# EAGLE board Laptimer (EAGLE 6.3)
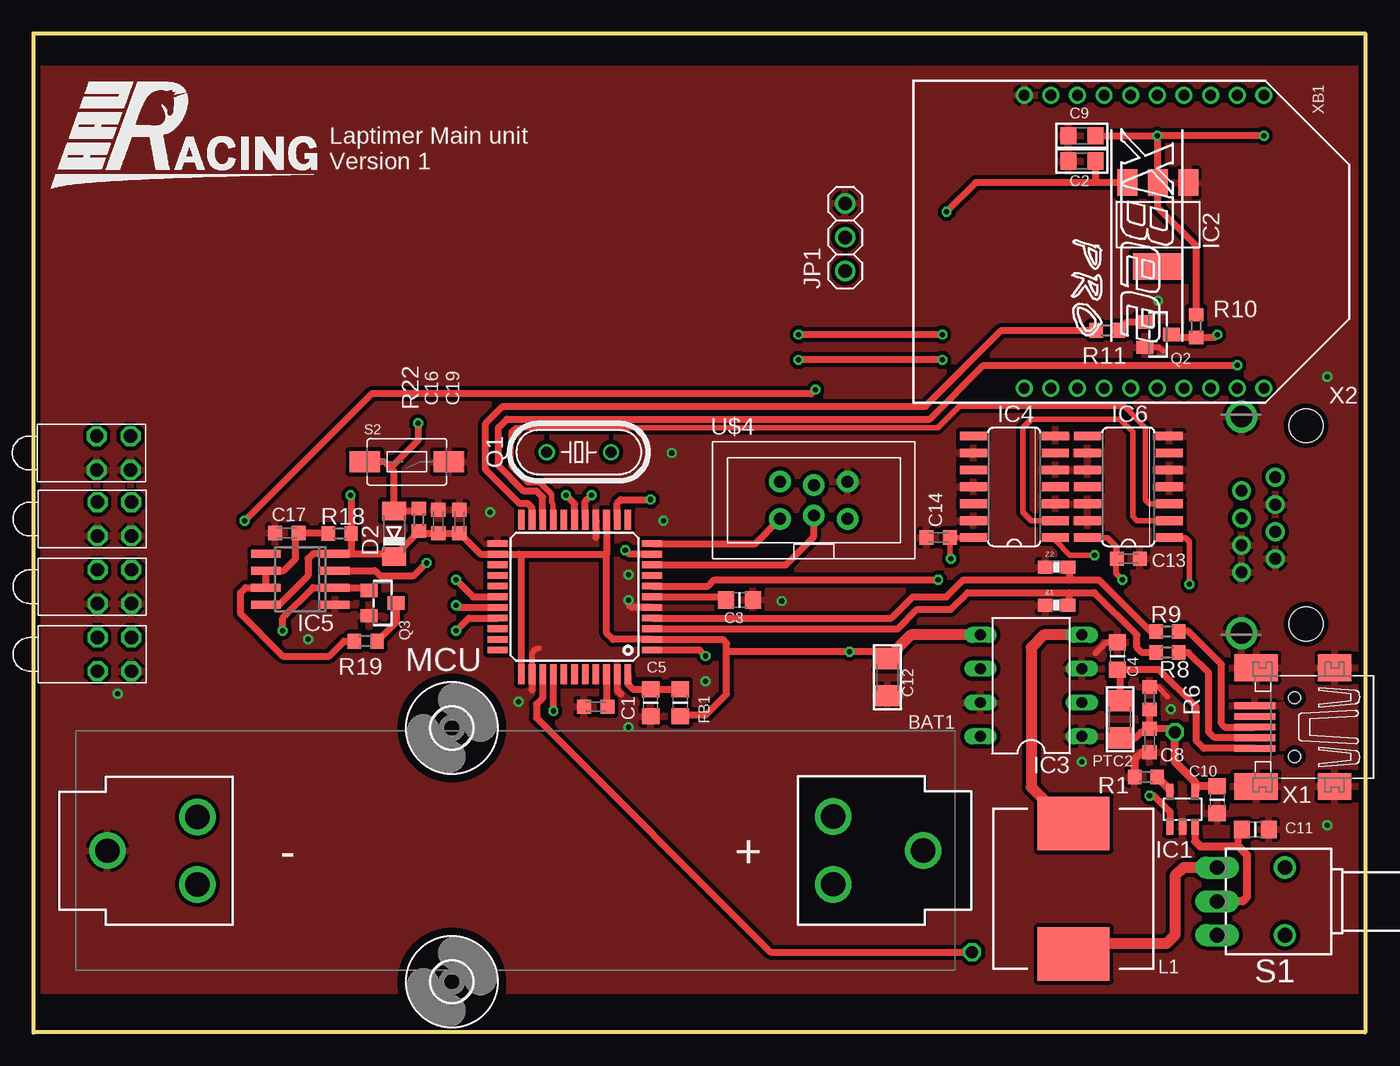
[diagram p0: board, top side]
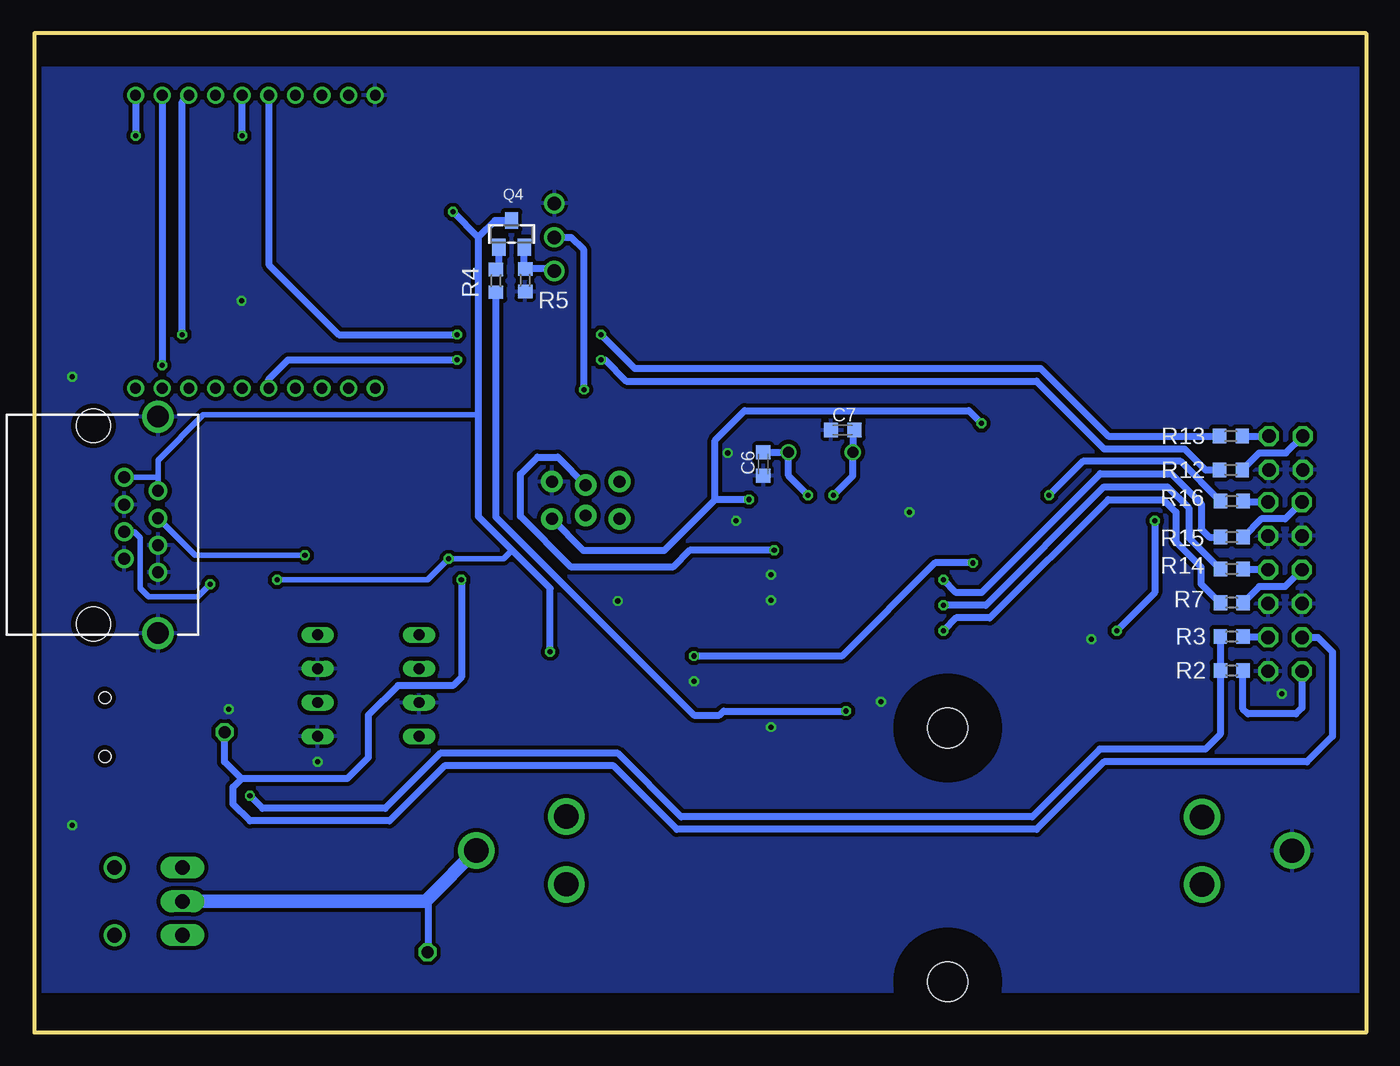
[diagram p1: board, bottom side, seen from below]

Size 100 x 75 mm. Coordinates in mm from the lower left corner, seen from the top.
Outline: 0,75 100,75 100,0 0,0 0,75
Copper layers (1*16): Top 0.0356mm / dielectric 1.5011mm / Bottom 0.0356mm
Design rules "LaenPCBOrder *": minimum track width 6mil, minimum drill 13mil, track to track 12mil, track to pad 12mil, pad to pad 12mil, via to via 12mil, smd to smd 12mil, copper to edge 15mil, drill to drill 6mil, minimum pad ring 7mil, minimum via ring 7mil, stop-mask expansion 3mil, vias tented up to drill 0mil, thermal gap 10mil

## Footprints (pad centres in the part's own frame; a part is rotated, then mirrored left to right if it is on the bottom)
BATTERY_18650-HOLDER = drill 1.829: GND@1 30.628,0.01; GND@2 23.88,2.55; GND@3 23.88,-2.53; PWR@1 -30.628,-0.01; PWR@2 -23.88,2.53; PWR@3 -23.88,-2.55
C0603K = smd 1.05 x 1.08: 1 -0.875,0; 2 0.875,0
_0805 = smd 1.2 x 1.3: 1 -1.016,0; 2 1.016,0
_0805MP = smd 1.2 x 1.3: 1 -1.016,0; 2 1.016,0
1206 = smd 1.6 x 1.8: 1 -1.4,0; 2 1.4,0
MINIMELF = smd 1.4 x 1.8: A 1.7,0; C -1.7,0
3,0 = hole 3: 0,0
SOT23-5L = smd 0.55 x 1.2: 1 -0.95,-1.3; 2 0,-1.3; 3 0.95,-1.3; 4 0.95,1.3; 5 -0.95,1.3
SOT223 = smd 1.499 x 2.007: 1 -2.261,-3.15; 2 0.025,-3.15; 3 2.311,-3.15 | smd 3.81 x 2.007: 4 0,3.15
DIL08 = drill 0.813 long: 1 -3.81,-3.81; 2 -1.27,-3.81; 3 1.27,-3.81; 4 3.81,-3.81; 5 3.81,3.81; 6 1.27,3.81; 7 -1.27,3.81; 8 -3.81,3.81
SO14 = smd 0.66 x 2.032: 1 -3.81,-3.073; 2 -2.54,-3.073; 3 -1.27,-3.073; 4 0,-3.073; 5 1.27,-3.073; 6 2.54,-3.073; 7 3.81,-3.073; 8 3.81,3.073; 9 2.54,3.073; 10 1.27,3.073; 11 0,3.073; 12 -1.27,3.073; 13 -2.54,3.073; 14 -3.81,3.073
SO08 = smd 0.6 x 2.2: 1 -1.905,-2.6; 2 -0.635,-2.6; 3 0.635,-2.6; 4 1.905,-2.6; 5 1.905,2.6; 6 0.635,2.6; 7 -0.635,2.6; 8 -1.905,2.6
1X03 = drill 1.016: 1 -2.54,0; 2 0,0; 3 2.54,0
CDRH125 = smd 5.4 x 4: 1 0,4.9; 2 0,-4.9
TQFP44 = smd 1.5 x 0.5: 1 -5.8,4; 2 -5.8,3.2; 3 -5.8,2.4; 4 -5.8,1.6; 5 -5.8,0.8; 6 -5.8,0; 7 -5.8,-0.8; 8 -5.8,-1.6; 9 -5.8,-2.4; 10 -5.8,-3.2; 11 -5.8,-4; 23 5.8,-4; 24 5.8,-3.2; 25 5.8,-2.4; 26 5.8,-1.6; 27 5.8,-0.8; 28 5.8,0; 29 5.8,0.8; 30 5.8,1.6; 31 5.8,2.4; 32 5.8,3.2; 33 5.8,4 | smd 0.5 x 1.5: 12 -4,-5.8; 13 -3.2,-5.8; 14 -2.4,-5.8; 15 -1.6,-5.8; 16 -0.8,-5.8; 17 0,-5.8; 18 0.8,-5.8; 19 1.6,-5.8; 20 2.4,-5.8; 21 3.2,-5.8; 22 4,-5.8; 34 4,5.8; 35 3.2,5.8; 36 2.4,5.8; 37 1.6,5.8; 38 0.8,5.8; 39 0,5.8; 40 -0.8,5.8; 41 -1.6,5.8; 42 -2.4,5.8; 43 -3.2,5.8; 44 -4,5.8
HC49/S = drill 0.813: 1 -2.413,0; 2 2.413,0
SOT23-WIDE = smd 1 x 1.27: 1 -0.95,-1; 2 0.95,-1; 3 0,1
R0603 = smd 1 x 1.1: 1 -0.85,0; 2 0.85,0
TL3XWO = drill 1.1 pad 1.422 long: 1 -2.54,-5.08; 2 0,-5.08; 3 2.54,-5.08 | drill 1.1 pad 1.676: M1 -2.54,0; M2 2.54,0
TACTILE-SWITCH-1101NE = smd 2.3 x 1.6: P$1 -3.15,0; P$2 3.15,0
BI-LEVEL-LED-INDICATOR = drill 1 octagon: ANODE1 1.27,1.27; ANODE2 1.27,-1.27; CATHODE1 -1.27,1.27; CATHODE2 -1.27,-1.27
AVRISP-BOX = drill 0.9 pad 1.626: 1 -1.397,2.54; 2 1.397,2.54; 3 -1.143,0; 4 1.143,0; 5 -1.397,-2.54; 6 1.397,-2.54
32005-301 = smd 3.1 x 0.5: 1 3,1.6; 2 3,0.8; 3 3,0; 4 3,-0.8; 5 3,-1.6 | smd 2.5 x 2: M1 -3,-4.45; M2 -3,4.45 | smd 3.3 x 2: M3 2.9,4.45; M4 2.9,-4.45 | hole 0.9: 0,2.2; 0,-2.2
GLX-S-88M = drill 0.9 pad 1.422: 1 -3.57,-2.3; 2 -2.55,-4.84; 3 -1.53,-2.3; 4 -0.51,-4.84; 5 0.51,-2.3; 6 1.53,-4.84; 7 2.55,-2.3; 8 3.57,-4.84 | drill 1.6 pad 2.184: S1 -8.125,-4.84; S2 8.125,-4.84 | hole 2.55: -7.44,0; 7.44,0
XBEE-PRO = drill 0.8 pad 1.27: 1 -11,9; 2 -11,7; 3 -11,5; 4 -11,3; 5 -11,1; 6 -11,-1; 7 -11,-3; 8 -11,-5; 9 -11,-7; 10 -11,-9; 11 11,-9; 12 11,-7; 13 11,-5; 14 11,-3; 15 11,-1; 16 11,1; 17 11,3; 18 11,5; 19 11,7; 20 11,9
0603-RES = smd 1.1 x 1: 1 -0.85,0; 2 0.85,0

## Placement (x,y rotation side)
BAT1  [BATTERY_18650-HOLDER]  36.2,13.65 180 top
C1  100n  [C0603K]  42.23,24.45 180 top
C2  10u  [_0805]  78.74,65.41 180 top
C3  1u  [_0805MP]  53.03,32.46 180 top
C4  22u  [_0805MP]  81.41,28.26 90 top
C5  1u  [_0805MP]  46.35,24.77 90 top
C6  22pf  [C0603K]  45.28,42.67 90 bottom
C7  22pf  [C0603K]  39.3,45.21 0 bottom
C8  100n  [C0603K]  83.82,21.91 270 top
C9  22u  [_0805]  78.74,67.31 180 top
C10  10u  [_0805MP]  88.9,17.46 90 top
C11  10u  [_0805MP]  91.76,15.24 0 top
C12  100u  [1206]  64.14,26.67 270 top
C13  100n  [C0603K]  82.23,35.56 180 top
C14  100n  [C0603K]  67.94,37.15 180 top
C16  100n  [C0603K]  30.42,38.35 90 top
C17  100n  [C0603K]  19.05,37.5 180 top
C19  100n  [C0603K]  32,38.35 90 top
D2  CD1206-S01575  [MINIMELF]  27.08,37.44 90 top
FB1  MH2029  [_0805MP]  48.58,24.77 90 top
H1  MOUNT-HOLE3.0  [3,0]  31.43,22.86 0 top
H2  MOUNT-HOLE3.0  [3,0]  31.43,3.81 0 top
IC1  MCP73831/OT  [SOT23-5L]  86.3,16.76 0 top
IC2  REG1117  [SOT223]  84.45,60.64 180 top
IC3  MAX631CPA  [DIL08]  74.93,26.04 90 top
IC4  74HC04D  [SO14]  73.66,40.96 90 top
IC5  NE555D  [SO08]  20.07,34.03 90 top
IC6  74HC08D  [SO14]  82.23,40.96 90 top
JP1  [1X03]  60.96,59.69 90 top
L1  DRA125-331-R  [CDRH125]  78.11,10.79 180 top
MCU  ATMEGA32U4-AU  [TQFP44]  40.65,32.7 180 top
PTC2  [1206]  81.6,23.5 90 top
Q1  8mhz  [HC49/S]  40.96,43.56 180 top
Q2  [SOT23-WIDE]  84.45,52.39 270 top
Q3  [SOT23-WIDE]  26.23,32.23 270 top
Q4  PBSS4120T  [SOT23-WIDE]  64.17,59.95 0 bottom
R1  2k  [R0603]  83.53,19.18 180 top
R2  470  [R0603]  10.1,27.17 180 bottom
R3  1k  [R0603]  10.11,29.72 180 bottom
R4  1k  [R0603]  65.35,56.42 90 bottom
R5  1k  [R0603]  63.15,56.47 270 bottom
R6  10k  [R0603]  83.82,25.08 90 top
R7  220  [R0603]  10.1,32.26 0 bottom
R8  22  [R0603]  85.16,28.51 0 top
R9  22  [R0603]  85.16,30.1 0 top
R10  1k  [R0603]  87.31,53.02 90 top
R11  1k  [R0603]  80.64,52.7 0 top
R12  220  [R0603]  10.16,42.23 0 bottom
R13  220  [R0603]  10.16,44.77 0 bottom
R14  220  [R0603]  10.1,34.8 0 bottom
R15  220  [R0603]  10.1,37.18 0 bottom
R16  220  [R0603]  10.1,39.88 0 bottom
R18  1k  [R0603]  23.02,37.46 180 top
R19  100  [R0603]  24.96,29.37 180 top
R22  10k  [R0603]  28.96,38.49 90 top
S1  TL36WO  [TL3XWO]  93.98,9.84 270 top
S2  SWITCH-MOMENTARY-2-SMD-1101NE  [TACTILE-SWITCH-1101NE]  28.05,42.83 180 top
U$1  BI-LEVEL-LED-INDICATOR  [BI-LEVEL-LED-INDICATOR]  6.1,28.38 90 top
U$4  AVRISP-BOX  [AVRISP-BOX]  58.61,39.95 90 top
U$11  BI-LEVEL-LED-INDICATOR  [BI-LEVEL-LED-INDICATOR]  6.03,43.5 90 top
U$18  BI-LEVEL-LED-INDICATOR  [BI-LEVEL-LED-INDICATOR]  6.1,33.46 90 top
U$19  BI-LEVEL-LED-INDICATOR  [BI-LEVEL-LED-INDICATOR]  6.1,38.54 90 top
X1  mini-usb  [32005-301]  94.72,22.92 180 top
X2  GLX-S-88M  [GLX-S-88M]  95.57,38.1 270 top
XB1  XBEE-PRO  [XBEE-PRO]  83.41,59.35 270 top
Z1  CG0603MLC-05E  [0603-RES]  76.83,32.07 0 top
Z2  CG0603MLC-05E  [0603-RES]  76.83,34.92 0 top

## Library data of the parts
BAT1 S2 = SparkFun-Electromechanical
C1 C6-C8 C13 C14 C16 C17 C19 R1-R16 R18 R19 R22 = rcl
C2-C5 C9-C12 FB1 PTC2 Q2-Q4 XB1 = microbuilder
D2 = diode
H1 H2 = holes
IC1 JP1 MCU U$4 = adafruit
IC2 = burr-brown; MPN: REG1117; OC_FARNELL: 1097566; OC_NEWARK: 14P6981
IC3 = maxim; OC_FARNELL: unknown; OC_NEWARK: unknown
IC4 IC6 = 74xx-eu
IC5 = linear
L1 = SparkFun-Passives
Q1 = adafruit; OC_FARNELL: 1667008; OC_NEWARK: unknown
S1 = switch
U$1 U$11 U$18 U$19 = unicorn_v2
X1 = con-cypressindustries; OC_FARNELL: unknown; OC_NEWARK: unknown
X2 = con-kycon; OC_FARNELL: unknown; OC_NEWARK: unknown
Z1 Z2 = SparkFun-DiscreteSemi

## Nets
1D+: R9.2 X1.3
1D-: R8.2 X1.2
3.3V: C9.1 IC2.2 R10.2 XB1.1 XB1.5
5.0V: C2.1 C12.1 C13.2 C14.1 C16.1 C19.1 D2.C FB1.1 IC2.3 IC3.5 IC4.14 IC5.4 IC5.8 IC6.14 MCU.2 MCU.14 MCU.24 MCU.34 Q4.3 R16.1 R18.1 R22.1 X2.1 X2.2
+UB: C8.1 C10.2 IC1.4 MCU.7 PTC2.1 R6.1 U$1.ANODE1
ASSOC: R12.1 XB1.15
BAT-ADC: BAT1.PWR@1 C11.1 IC1.3 MCU.36 S1.2
CHRG-DONE-LED: R3.1 U$1.ANODE2
D+: MCU.4 R9.1 Z2.2
D-: MCU.3 R8.1 Z1.2
GND: BAT1.GND@1 C1.2 C2.2 C3.1 C4.2 C5.1 C6.1 C7.1 C8.2 C9.2 C10.1 C11.2 C12.2 C13.1 C14.2 C16.2 C17.2 C19.2 IC1.2 IC2.1 IC3.1 IC3.3 IC3.7 IC4.3 IC4.5 IC4.7 IC4.9 IC4.11 IC4.13 IC5.1 IC6.4 IC6.5 IC6.7 IC6.9 IC6.10 IC6.12 IC6.13 JP1.3 MCU.5 MCU.15 MCU.23 MCU.35 MCU.43 Q2.2 Q3.2 R1.2 R5.2 R6.2 S2.P$1 U$1.CATHODE2 U$4.6 U$11.CATHODE1 U$11.CATHODE2 U$18.CATHODE1 U$18.CATHODE2 U$19.CATHODE1 U$19.CATHODE2 X1.5 X1.M1 X1.M2 X1.M3 X1.M4 X2.3 X2.6 X2.7 X2.8 X2.S1 X2.S2 XB1.10 Z1.1 Z2.1
LASER: MCU.37 R4.1
LED1: MCU.30 R7.1
LED2: MCU.29 R14.1
LED3: MCU.28 R15.1
MISO: MCU.11 U$4.1
MOSI: MCU.10 U$4.4
N$3: IC1.5 R1.1
N$4: IC1.1 R2.2 R3.2
N$5: JP1.1 Q4.2 R5.1
N$6: Q4.1 R4.2
N$7: C5.2 FB1.2 MCU.44
N$9: C1.1 MCU.42
N$12: C3.2 MCU.6
N$13: C4.1 PTC2.2 X1.1
N$14: R2.1 U$1.CATHODE1
N$15: R7.2 U$18.ANODE1
N$17: R12.2 U$11.ANODE1
N$18: Q2.1 R11.2
N$19: R13.2 U$11.ANODE2
N$20: IC4.1 X2.4
N$21: R14.2 U$18.ANODE2
N$22: IC6.1 X2.5
N$24: IC3.4 L1.2
N$25: R15.2 U$19.ANODE1
N$26: L1.1 S1.1
N$28: IC4.2 IC6.2
N$32: R16.2 U$19.ANODE2
N$36: C17.1 IC5.6 IC5.7 R18.2 R19.2
N$41: Q3.3 R19.1
PT-IN: IC5.2 JP1.2 Q3.1
PT-OUT: IC5.3 MCU.1
REMOTE-LASER: IC6.3 MCU.19
RSSI: R13.1 XB1.6
RST: D2.A MCU.13 R22.2 S2.P$2 U$4.5
RX2: MCU.20 XB1.2
SCK: MCU.9 U$4.3
TX2: MCU.21 R11.1
TX2L: Q2.3 R10.1 XB1.3
VCC: U$4.2
XTAL1: C7.2 MCU.17 Q1.2
XTAL2: C6.2 MCU.16 Q1.1

## Tracks (layer width: path | path; a pad name or v marks a point on that pad's centre or on a via)
1D+
  Top 0.508: X1.3 89.47,22.92 89.22,23.18 89.22,27.62 86.74,30.1 R9.2
1D-
  Top 0.508: X1.2 88.68,22.12 88.27,22.54 88.27,26.99 86.74,28.51 R8.2
3.3V  (via drill 0.38)
  Top 0.508: v84.39,67.31 84.43,66.71 IC2.2 84.45,63.77 84.45,61.91 87.31,59.05 R10.2 | C9.1 v84.39,67.31 | v92.39,67.31 v84.39,67.31
  Bottom 0.508: v84.39,67.31 84.41,67.36 XB1.5 | XB1.1 92.39,70.34 v92.39,67.31
5.0V  (via drill 0.38)
  Top 0.406: C13.2 81.36,36.44 81.28,36.51 | IC4.14 C14.1 68.82,35.64 v68.9,35.56 | IC6.14 80.64,37.15 81.28,36.51 | 81.28,36.51 81.28,34.48 v81.79,33.97
  Top 0.508: FB1.1 48.64,23.81 50.48,23.81 52.07,25.4 52.07,28.57 | MCU.14 43.05,35.9 | 36.51,35.9 MCU.24 33.57,35.9 C19.1 C16.1 29.12,37.47 R22.1 28.96,37.61 D2.C 26.89,35.93 23.87,35.93 | 36.51,35.9 43.05,35.9 | MCU.34 36.65,35.77 36.51,35.9 | 43.05,35.9 43.05,29.98 43.52,29.5 MCU.2 51.78,29.5 52.07,29.21 52.07,28.57 | 23.87,35.93 R18.1 23.87,40.27 v23.81,40.32 | 23.87,35.93 IC5.4 21.01,35.93 20.64,35.56 20.64,34.29 18.47,32.12 IC5.8 | IC2.3 79.69,63.79 | 79.69,63.79 70.78,63.79 v68.58,61.59 | C2.1 79.76,63.86 79.69,63.79 | 64.27,28.07 C12.1 63.31,28.57 v61.28,28.57 52.07,28.57
  Top 0.813: IC3.5 65.91,29.84 C12.1
  Bottom 0.406: X2.1 90.73,41.67 | X2.2 90.73,41.67 | 90.73,41.67 90.73,42.94 87.31,46.35 66.67,46.35 | 64.14,36.2 64.77,35.56 v68.9,35.56 70.48,33.97 v81.79,33.97
  Bottom 0.508: Q4.3 65.42,60.95 66.67,59.69 | 66.67,59.69 66.67,46.35 66.67,38.73 64.14,36.2 61.28,33.34 v61.28,28.57 | v68.58,61.59 66.67,59.69 | R16.1 13.93,42.86 21.27,42.86 v23.81,40.32
+UB  (via drill 0.38, 0.9)
  Top 0.508: MCU.7 50.65,33.5 51.12,33.97 v67.94,33.97 | PTC2.1 82.74,22.09 83.19,22.54 83.58,22.54 C8.1 | R6.1 C8.1 | v85.72,22.54 85.48,22.78 C8.1
  Top 0.61: v85.72,22.54 85.72,20.32 87.25,18.8 IC1.4 87.25,18.48 C10.2
  Bottom 0.508: U$1.ANODE1 3.62,29.65 2.54,28.57 2.54,22.23 4.45,20.32 19.68,20.32 24.77,15.24 51.75,15.24 56.52,20 69.22,20 73.34,15.88 83.82,15.88 85.09,17.14 85.09,18.41 84.45,19.05 | v67.94,33.97 67.94,26.67 68.58,26.04 72.71,26.04 74.93,23.81 74.93,20.64 76.52,19.05 84.45,19.05 | 84.45,19.05 85.72,20.32 v85.72,22.54
ASSOC  (via drill 0.38)
  Top 0.508: v68.26,50.48 v57.47,50.48
  Bottom 0.508: XB1.15 82.41,49.04 80.96,50.48 v68.26,50.48 | v57.47,50.48 57.15,50.48 55.56,48.9 24.77,48.9 19.68,43.81 13.65,43.81 12.06,42.23 R12.1
BAT-ADC  (via drill 0.9)
  Top 0.508: 90.49,13.97 90.49,14.99 C11.1 | MCU.36 38.25,25.1 37.78,24.64 37.78,23.62 55.37,6.03 v70.48,6.03 | 87.25,14.35 IC1.3
  Top 0.61: 87.25,14.35 87.63,13.97 90.49,13.97 91.12,13.34 91.12,10.16 90.81,9.84 S1.2
  Bottom 0.508: v70.48,6.03 70.41,6.11 70.41,10.08
  Bottom 1.016: BAT1.PWR@1 70.41,10.08 70.64,9.84 S1.2
CHRG-DONE-LED
  Bottom 0.508: U$1.ANODE2 9.19,29.65 R3.1
D+
  Top 0.508: MCU.4 64.44,31.1 66.04,32.7 68.58,32.7 69.85,33.97 77.79,33.97 | 77.79,33.97 80.01,33.97 83.88,30.1 R9.1 | Z2.2 77.79,34.82 77.79,33.97
D-
  Top 0.508: MCU.3 64.91,30.3 66.36,31.75 68.9,31.75 70.17,33.02 77.79,33.02 | 77.79,33.02 79.69,33.02 82.87,29.84 82.87,28.89 83.25,28.51 R8.1 | Z1.2 77.79,32.17 77.79,33.02
GND  (via drill 0.38)
  Top 0.406: 37.45,25.74 37.45,28.3 arc-90 37.97,28.83 | C4.2 80.58,29.27 79.76,28.45 | R6.2 84.43,25.93 85.15,25.21 | Q2.2 84.52,51.44 84.84,51.12
  Top 0.508: MCU.43 43.85,25.69 44.13,25.4 | MCU.35 37.45,25.74 37.47,25.72 | MCU.15 42.25,37.17 42.23,37.15 | MCU.5 44.93,31.9 44.77,32.07
  Top 0.61: C8.2 83.26,21.03 82.68,20.45 R1.2
  other vias: 47.94,43.5 6.34,25.42 47.31,38.42 50.48,26.35 20.64,29.53 97.16,15.56 97.16,49.21 78.74,20.32 34.29,39.05 84.45,54.93 56.2,32.38 85.41,24.26 36.45,24.83 44.7,34.35 44.7,32.45 44.7,22.92
  pour Top: 0,72.33 100.14,72.33 100.14,3.12 0.13,3.12
  pour Bottom: 0,72.33 100.14,72.33 100.14,3.12 0.13,3.12
LASER  (via drill 0.38)
  Top 0.508: v39.05,24.13 MCU.37
  Bottom 0.508: v39.05,24.13 48.26,24.13 48.58,23.81 50.48,23.81 65.35,38.68 R4.1
LED1  (via drill 0.38)
  Top 0.508: v31.75,30.16 32.69,31.1 MCU.30
  Bottom 0.508: R7.1 10.99,32.26 12.38,33.66 12.38,34.92 14.29,36.83 14.29,39.05 15.24,40.01 19.37,40.01 28.26,31.11 30.8,31.11 v31.75,30.16
LED2  (via drill 0.38)
  Top 0.508: v31.75,32.07 31.91,31.9 MCU.29
  Bottom 0.508: R14.1 10.99,34.8 13.34,37.15 13.34,39.37 14.92,40.96 19.68,40.96 28.57,32.07 v31.75,32.07
LED3  (via drill 0.38)
  Top 0.508: v31.75,33.97 33.02,32.7 MCU.28
  Bottom 0.508: v31.75,33.97 30.8,33.02 28.89,33.02 19.97,41.95 14.64,41.95 12.38,39.69 12.38,37.78 11.78,37.18 R15.1
MISO
  Top 0.508: MCU.11 54.22,36.7 U$4.1
MOSI  (via drill 0.38)
  Top 0.508: MCU.10 44.74,35.9 v44.45,36.2
  Bottom 0.508: v44.45,36.2 50.8,36.2 52.07,34.92 59.69,34.92 63.5,38.73 63.5,41.91 62.23,43.18 60.7,43.18 U$4.4
N$3
  Top 0.61: IC1.5 85.35,18.22 R1.1
N$4  (via drill 0.38)
  Top 0.508: v83.82,17.78 84.14,17.78 85.35,16.57 IC1.1
  Bottom 0.508: R3.2 10.96,27.18 | 10.96,27.18 R2.2 | 10.96,27.18 10.96,22.38 12.06,21.27 20,21.27 25.08,16.19 51.44,16.19 56.2,20.95 69.53,20.95 73.66,16.83 82.87,16.83 v83.82,17.78
N$5
  Bottom 0.508: JP1.1 61.13,57.32 R5.1 63.23,57.39 Q4.2
N$6
  Bottom 0.508: R4.2 65.12,57.49 Q4.1
N$7
  Top 0.508: MCU.44 44.65,26.16 45.02,25.78 C5.2 FB1.2
N$9
  Top 0.508: MCU.42 43.05,24.5 C1.1
N$12
  Top 0.508: MCU.6 51.82,32.7 C3.2
N$13
  Top 0.508: 81.92,25.12 PTC2.2 81.6,27.11 C4.1 84.52,27.24 87.31,24.45 87.31,21.91 87.9,21.32 X1.1
N$14
  Bottom 0.508: U$1.CATHODE1 4.83,24.36 5.28,23.91 8.89,23.91 9.25,24.27 R2.1
N$15
  Bottom 0.508: U$18.ANODE1 6.1,33.47 8.04,33.47 R7.2
N$17
  Bottom 0.508: R12.2 8.04,43.5 6.03,43.5 U$11.ANODE1
N$18
  Top 0.508: R11.2 82.13,53.34 Q2.1
N$19
  Bottom 0.508: R13.2 U$11.ANODE2
N$20  (via drill 0.38)
  Top 0.406: IC4.1 76.73,36.93 77.85,35.81 v79.69,35.81
  Bottom 0.406: v79.69,35.81 87.93,35.81 X2.4
N$21
  Bottom 0.508: U$18.ANODE2 9.18,34.73 R14.2
N$22  (via drill 0.38)
  Top 0.406: v86.81,33.66 86.81,36.83 86.49,37.15 IC6.1
  Bottom 0.406: X2.5 92.52,37.59 92.08,37.15 92.08,33.34 91.44,32.7 87.76,32.7 v86.81,33.66
N$24
  Top 0.813: IC3.4 75.88,29.84 74.93,28.89 74.93,18.41 77.15,16.19 77.92,16.19 L1.2
N$25
  Bottom 0.508: U$19.ANODE1 6.09,38.55 7.88,38.55 R15.2
N$26
  Top 0.813: S1.1 86.36,12.38 85.72,11.75 85.72,7.3 85.09,6.67 78.56,6.67 L1.1
N$28
  Top 0.406: IC6.2 82.87,38.42 82.55,38.73 82.55,45.09 81.6,46.04 74.93,46.04 74.3,45.4 74.3,39.05 74.93,38.42 IC4.2
N$32
  Bottom 0.508: U$19.ANODE2 9.25,39.81 R16.2
N$36
  Top 0.508: R18.2 22.12,37.5 C17.1 19.68,37.26 19.68,35.56 18.79,34.66 IC5.6 IC5.7 15.93,33.39 15.56,33.02 15.56,31.43 18.73,28.26 22.23,28.26 23.34,29.37 R19.2
N$41
  Top 0.508: Q3.3 27.23,30.79 R19.1
PT-IN  (via drill 0.38)
  Top 0.508: Q3.1 25.23,33.39 IC5.2 21.01,33.39 18.73,31.11 v18.73,30.16 | v15.88,38.42 25.4,47.94 58.42,47.94 v58.74,48.26
  Bottom 0.508: JP1.2 59.69,59.69 58.74,58.74 v58.74,48.26 | v15.88,38.42 15.88,33.02 v18.73,30.16
PT-OUT  (via drill 0.38)
  Top 0.508: IC5.3 25.66,34.66 26.04,34.29 28.57,34.29 v29.53,35.24 | v50.48,28.26 50.04,28.7 MCU.1
  Bottom 0.508: v29.53,35.24 32.38,35.24 39.37,28.26 v50.48,28.26
REMOTE-LASER
  Top 0.406: MCU.19 39.05,39.66 38.92,39.78 38.92,40.42 38.07,41.27 37.15,41.27 35.88,42.55 35.88,45.09 36.2,45.4 67.94,45.4 69.53,46.99 81.92,46.99 83.5,45.4 83.5,40.01 83.82,39.69 IC6.3
RSSI  (via drill 0.38)
  Top 0.508: v68.26,52.39 v57.47,52.39
  Bottom 0.508: XB1.6 82.41,57.64 77.15,52.39 v68.26,52.39 | v57.47,52.39 54.93,49.85 24.45,49.85 19.37,44.77 R13.1
RST  (via drill 0.38)
  Top 0.508: R22.2 28.76,39.14 D2.A 27.08,42.13 26.83,42.39 | MCU.13 43.85,39.72 44.13,40.01 v46.35,40.01 | 26.83,42.39 26.38,42.83 S2.P$2 | v28.89,45.72 28.89,44.45 26.83,42.39
  Bottom 0.508: v46.35,40.01 48.9,40.01 | 48.9,40.01 48.9,44.45 46.67,46.67 29.84,46.67 v28.89,45.72 | U$4.5 58.79,36.2 52.7,36.2 48.9,40.01
RX2  (via drill 0.38)
  Top 0.508: MCU.20 38.25,40.18 37.78,40.64 36.83,40.64 34.92,42.55 34.92,45.4 35.56,46.04 67.31,46.04 71.36,50.08 v90.41,50.08
  Bottom 0.508: XB1.2 v90.41,50.08
SCK
  Top 0.508: MCU.9 56.5,35.1 58.61,37.21 U$4.3
TX2
  Top 0.508: MCU.21 37.45,39.39 37.15,39.69 36.51,39.69 33.97,42.23 33.97,45.72 35.24,46.99 66.99,46.99 72.71,52.7 R11.1
TX2L  (via drill 0.38)
  Top 0.508: v88.9,52.39 88.69,52.17 R10.1 85.67,52.17 Q2.3
  Bottom 0.508: v88.9,52.39 88.9,69.86 XB1.3
XTAL1  (via drill 0.38)
  Top 0.508: MCU.17 40.65,39.68 v40.01,40.32
  Bottom 0.508: v40.01,40.32 38.55,41.78 Q1.2 38.55,45.09 C7.2
XTAL2  (via drill 0.38)
  Top 0.508: MCU.16 41.45,39.86 v41.91,40.32
  Bottom 0.508: v41.91,40.32 43.38,41.79 Q1.1 45.26,43.56 C6.2

## Text on the board
tSilk: Laptimer Main unit / Version 1